# Altium PCB OneWireController.PcbDoc
Units mil, origin at the board's own origin, x right, y up, seen from the top; angles counter-clockwise.
Board outline 5413.39 x 4704.72 mil, 2 copper layers (Top Layer, Bottom Layer); 117 components, 95 nets, 388 pads, 0 vias.
Unrouted connection lines stored in the file: 256.
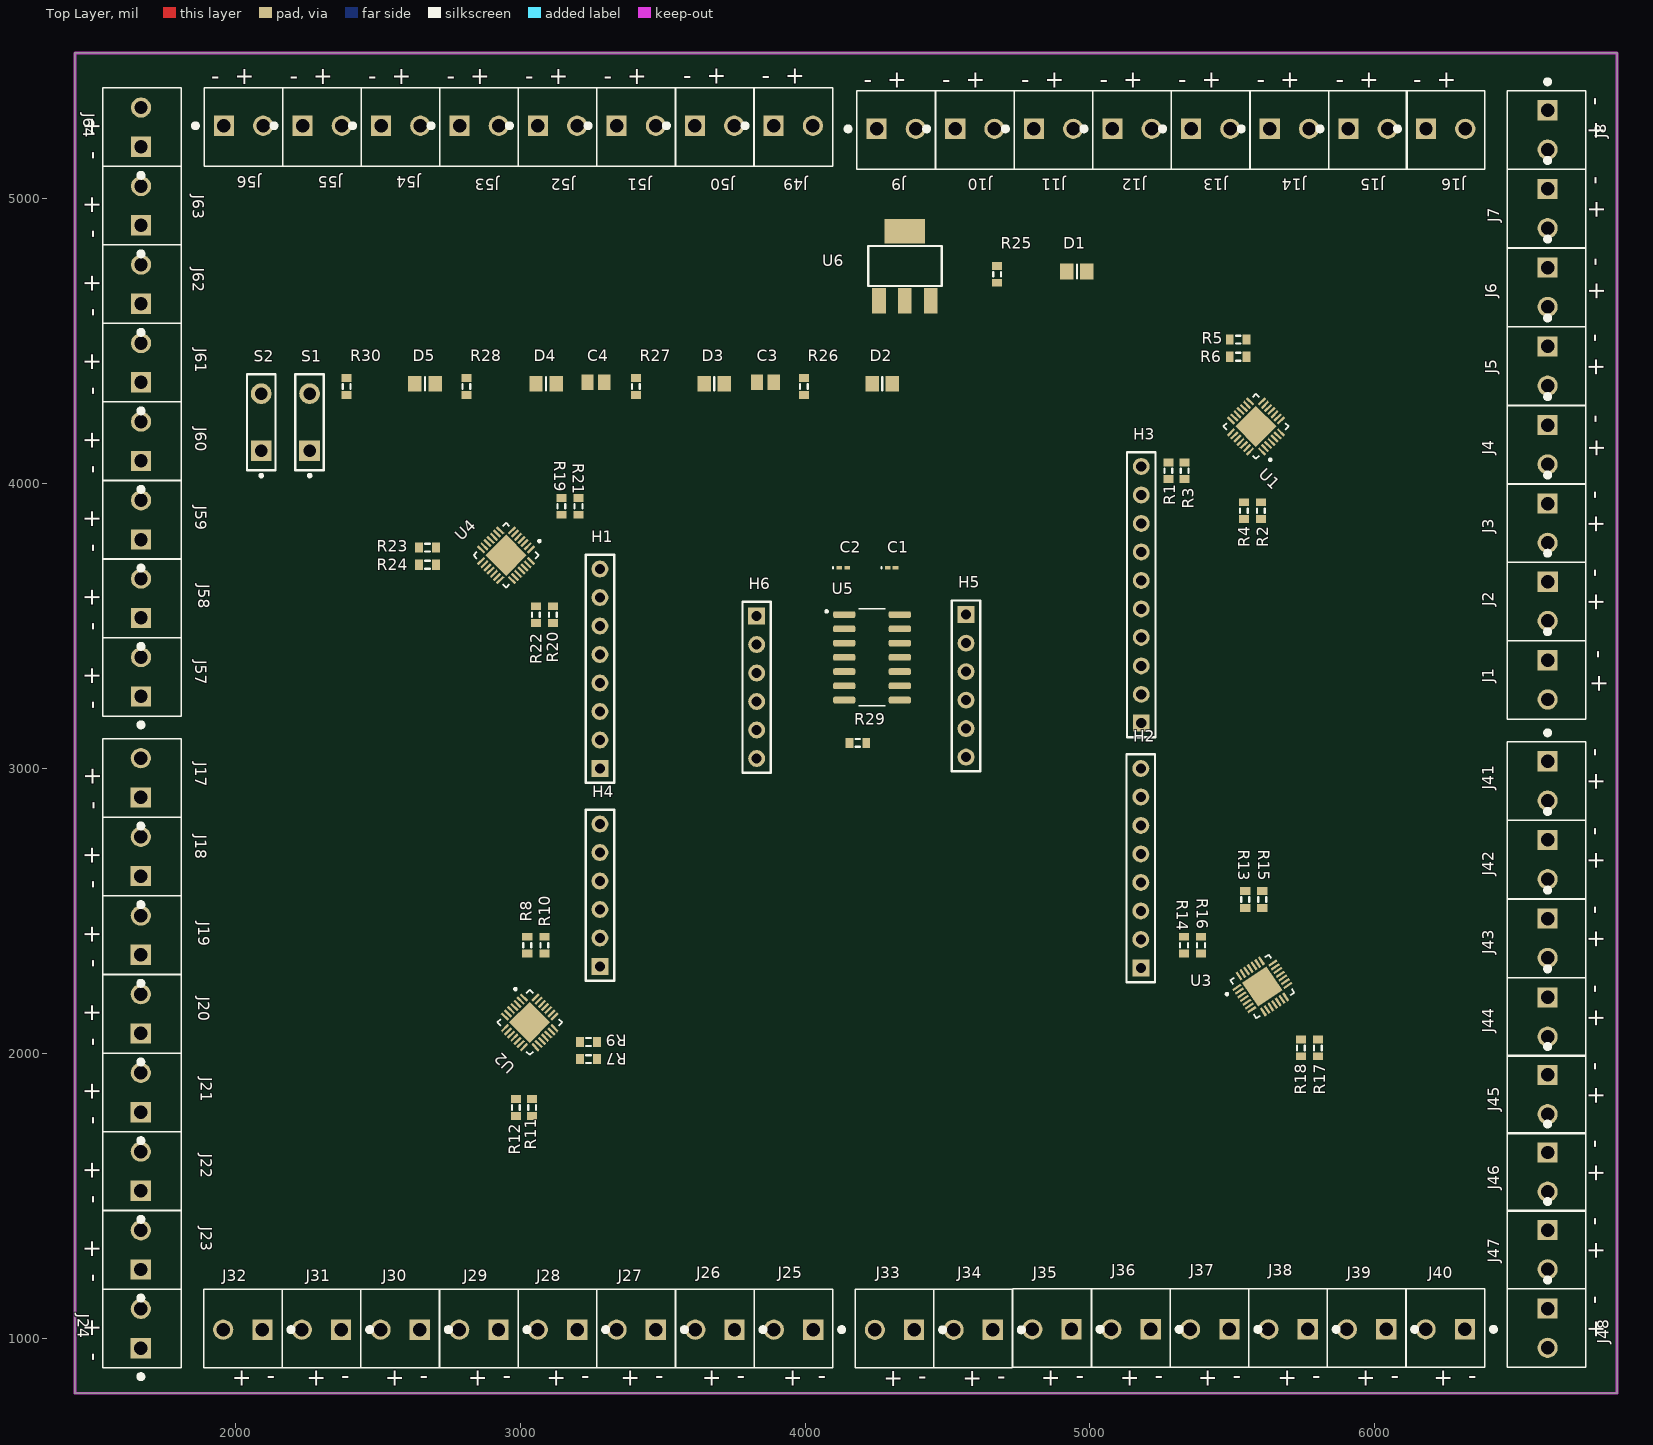
[diagram p0: Top Layer view]
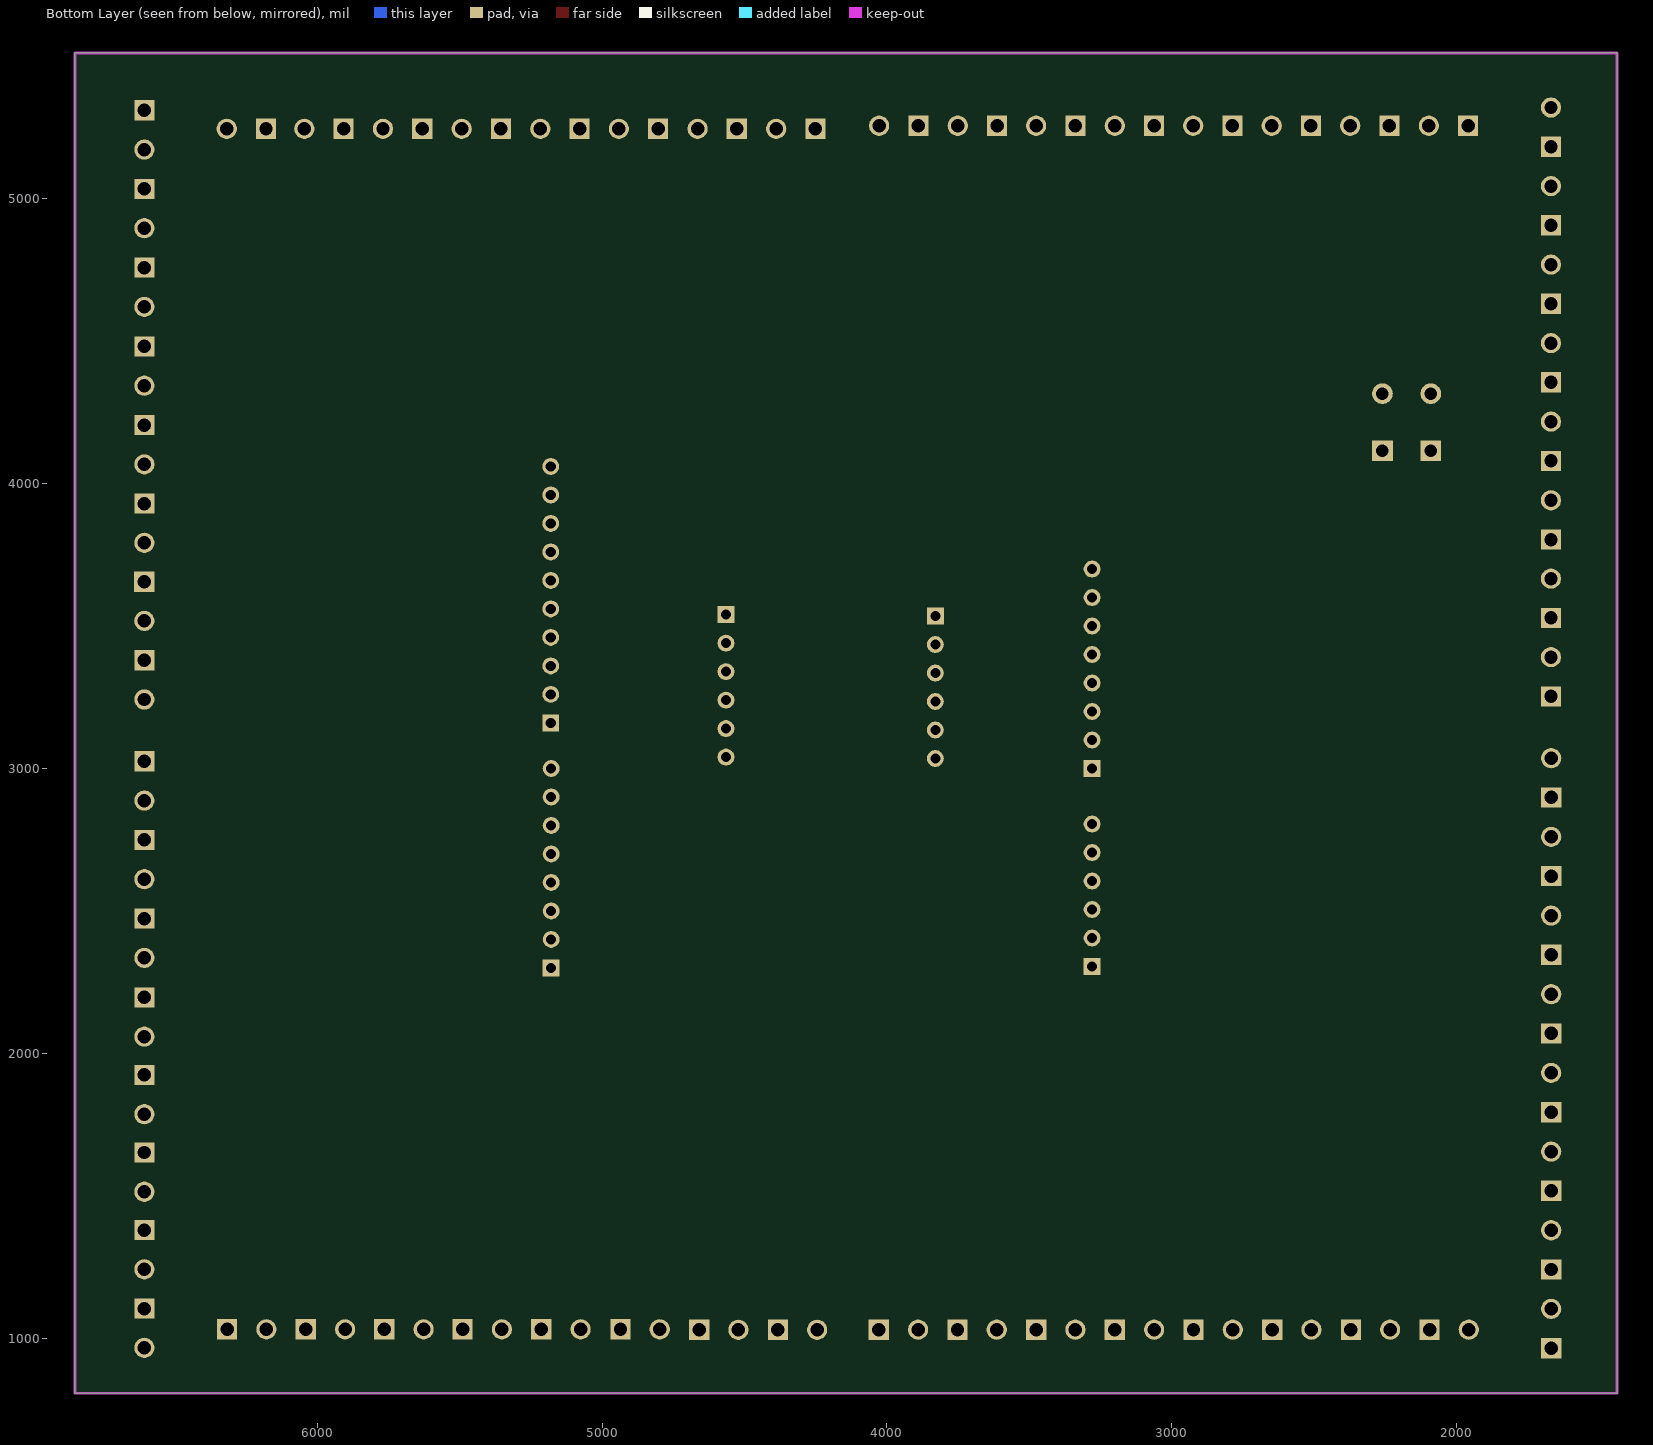
[diagram p1: Bottom Layer view, seen from below]

## Layer stack, top to bottom
Top Solder: solder mask 0.4, Solder Resist, Dk 3.5
Top Layer: signal copper 1.4
Dielectric 1: dielectric 12.6, FR-4, Dk 4.8
Bottom Layer: signal copper 1.4
Bottom Solder: solder mask 0.4, Solder Resist, Dk 3.5

## Board outline
1437.01,807.09 6850.39,807.09 6850.39,5511.81 1437.01,5511.81

## Design rules (kind name [scope] priority, off if disabled: settings)
Clearance [All] p1: gap=10 ignorepadtopadclearanceinfootprint=FALSE except(0: Arc-Hole Track-Hole SMDPad-Hole THPad-Hole Via-Hole Fill-Hole Poly-Hole Region-Hole Text-Hole)
PolygonConnect [All] p1: connectstyle=Relief reliefconductorwidth=10 reliefentries=4 polygonreliefangle="90 Angle" airgapwidth=10
RoutingVias [All] p1: holewidth=28 width=50 viastyle="Through Hole" minholewidth=28 minwidth=50 maxholewidth=28 maxwidth=50
SolderMaskExpansion [All] p1: expansion=4 istentingtop=FALSE
Width [All] p1: maxlimit=10 minlimit=10 preferedwidth=10
30 further rules are at their usual default settings.

## Classes and differential pairs
component class Sheet3: C3 C4 D1 D2 D3 D4 D5 R25 R26 R27 R28 R30 S1 S2 U6
component class Sheet2: J1 J2 J3 J4 J5 J6 J7 J8 J9 J10 J11 J12 J13 J14 J15 J16 J17 J18 J19 J20 J21 J22 J23 J24 J25 J26 J27 J28 J29 J30 J31 J32 J33 J34 J35 J36 J37 J38 J39 J40 J41 J42 J43 J44 J45 J46 J47 J48 J49 J50 J51 J52 J53 J54 J55 J56 J57 J58 J59 J60 J61 J62 J63 J64
component class Sheet1: C1 C2 H1 H2 H3 H4 H5 H6 R1 R2 R3 R4 R5 R6 R7 R8 R9 R10 R11 R12 R13 R14 R15 R16 R17 R18 R19 R20 R21 R22 R23 R24 R29 U1 U2 U3 U4 U5

## Components (designator, comment, footprint, x,y, rotation, side; value= is the part's Value field where it differs from the comment)
C1 "" 0603 4303.78,3705 r0 top value=100nF
C2 "" 0603 4133.78,3705 r0 top value=100nF
C3 "" C0805 3861.06,4355.55 r0 top value=4.7uF
C4 "" C0805 3266.06,4355.55 r0 top value=4.7uF
D1 "" 6-0805_N 4954.06,4744.25 r0 top
D2 "" 6-0805_N 4271.06,4350.55 r0 top
D3 "" 6-0805_N 3681.06,4350.55 r0 top
D4 "" 6-0805_N 3091.06,4350.55 r0 top
D5 "" 6-0805_N 2666.06,4350.55 r0 top
H1 "Header 8" HDR1X8 3280,3000 r90 top locked
H2 "Header 8" HDR1X8 5178.55,2300 r90 top locked
H3 "Header 10" HDR1X10 5180,3160 r90 top locked
H4 "PA1" HDR1X6 3280,2305 r90 top locked
H5 "PA1" HDR1X6 4565,3540 r270 top
H6 "PA1" HDR1X6 3830,3535 r270 top
J1 "1776275-2" TE_1776275-2 6606.3,3379.92 r270 top
J2 "1776275-2" TE_1776275-2 6606.47,3655.51 r270 top
J3 "1776275-2" TE_1776275-2 6606.3,3929.81 r270 top
J4 "1776275-2" TE_1776275-2 6606.14,4205.08 r270 top
J5 "1776275-2" TE_1776275-2 6606.3,4481.22 r270 top
J6 "1776275-2" TE_1776275-2 6606.3,4757.87 r270 top
J7 "1776275-2" TE_1776275-2 6606.3,5034.02 r270 top
J8 "1776275-2" TE_1776275-2 6606.3,5310.16 r270 top
J9 "1776275-2" TE_1776275-2 4250.86,5245.08 r0 top
J10 "1776275-2" TE_1776275-2 4527,5245.08 r0 top
J11 "1776275-2" TE_1776275-2 4803.15,5245.08 r0 top
J12 "1776275-2" TE_1776275-2 5078.74,5245.08 r0 top
J13 "1776275-2" TE_1776275-2 5354.87,5245.08 r0 top
J14 "1776275-2" TE_1776275-2 5631.02,5245.08 r0 top
J15 "1776275-2" TE_1776275-2 5907.16,5245.08 r0 top
J16 "1776275-2" TE_1776275-2 6179.37,5245.08 r0 top
J17 "1776275-2" TE_1776275-2 1668.6,2898.31 r90 top
J18 "1776275-2" TE_1776275-2 1668.6,2622.16 r90 top
J19 "1776275-2" TE_1776275-2 1668.6,2346.02 r90 top
J20 "1776275-2" TE_1776275-2 1668.6,2069.87 r90 top
J21 "1776275-2" TE_1776275-2 1668.6,1793.73 r90 top
J22 "1776275-2" TE_1776275-2 1668.6,1517.58 r90 top
J23 "1776275-2" TE_1776275-2 1668.6,1241.44 r90 top
J24 "1776275-2" TE_1776275-2 1668.6,965.29 r90 top
J25 "1776275-2" TE_1776275-2 4028.54,1030.28 r180 top
J26 "1776275-2" TE_1776275-2 3752.4,1030.28 r180 top
J27 "1776275-2" TE_1776275-2 3476.25,1030.28 r180 top
J28 "1776275-2" TE_1776275-2 3200.11,1030.28 r180 top
J29 "1776275-2" TE_1776275-2 2923.97,1030.28 r180 top
J30 "1776275-2" TE_1776275-2 2647.82,1030.28 r180 top
J31 "1776275-2" TE_1776275-2 2371.68,1030.28 r180 top
J32 "1776275-2" TE_1776275-2 2095.53,1030.28 r180 top
J33 "1776275-2" TE_1776275-2 4382.9,1029.9 r180 top
J34 "1776275-2" TE_1776275-2 4659.05,1029.9 r180 top
J35 "1776275-2" TE_1776275-2 4935.19,1031.5 r180 top
J36 "1776275-2" TE_1776275-2 5213.06,1031.5 r180 top
J37 "1776275-2" TE_1776275-2 5489.2,1031.5 r180 top
J38 "1776275-2" TE_1776275-2 5764.24,1031.5 r180 top
J39 "1776275-2" TE_1776275-2 6039.83,1031.5 r180 top
J40 "1776275-2" TE_1776275-2 6315.97,1031.5 r180 top
J41 "1776275-2" TE_1776275-2 6606.3,3025.2 r270 top
J42 "1776275-2" TE_1776275-2 6606.3,2749.06 r270 top
J43 "1776275-2" TE_1776275-2 6606.3,2472.91 r270 top
J44 "1776275-2" TE_1776275-2 6606.3,2196.54 r270 top
J45 "1776275-2" TE_1776275-2 6606.3,1924.34 r270 top
J46 "1776275-2" TE_1776275-2 6606.3,1652.13 r270 top
J47 "1776275-2" TE_1776275-2 6606.3,1379.92 r270 top
J48 "1776275-2" TE_1776275-2 6606.3,1104.33 r270 top
J49 "1776275-2" TE_1776275-2 3889.76,5255.91 r0 top
J50 "1776275-2" TE_1776275-2 3613.62,5255.91 r0 top
J51 "1776275-2" TE_1776275-2 3338.58,5255.91 r0 top
J52 "1776275-2" TE_1776275-2 3062.44,5255.91 r0 top
J53 "1776275-2" TE_1776275-2 2787.4,5255.91 r0 top
J54 "1776275-2" TE_1776275-2 2511.81,5255.91 r0 top
J55 "1776275-2" TE_1776275-2 2236.22,5255.91 r0 top
J56 "1776275-2" TE_1776275-2 1960.07,5255.91 r0 top
J57 "1776275-2" TE_1776275-2 1669.29,3252.95 r90 top
J58 "1776275-2" TE_1776275-2 1669.29,3528.54 r90 top
J59 "1776275-2" TE_1776275-2 1669.29,3803.58 r90 top
J60 "1776275-2" TE_1776275-2 1669.29,4079.73 r90 top
J61 "1776275-2" TE_1776275-2 1669.29,4355.32 r90 top
J62 "1776275-2" TE_1776275-2 1669.29,4630.91 r90 top
J63 "1776275-2" TE_1776275-2 1669.29,4906.5 r90 top
J64 "1776275-2" TE_1776275-2 1669.29,5182.09 r90 top
R1 "" J1-0603 5275,4045 r90 top value=100R
R2 "" J1-0603 5600,3905 r90 top value=100R
R3 "" J1-0603 5332.25,4045 r90 top value=100R
R4 "" J1-0603 5540,3905 r90 top value=100R
R5 "" J1-0603 5520,4505 r0 top value=0R
R6 "" J1-0603 5520,4445 r0 top value=0R
R7 "" J1-0603 3240,1980 r180 top value=100R
R8 "" J1-0603 3025,2380 r270 top value=100R
R9 "" J1-0603 3240,2040 r180 top value=100R
R10 "" J1-0603 3085,2380 r270 top value=100R
R11 "" J1-0603 3042.25,1810 r90 top value=0R
R12 "" J1-0603 2985,1810 r90 top value=0R
R13 "" J1-0603 5545,2540 r270 top value=100R
R14 "" J1-0603 5330,2380 r270 top value=100R
R15 "" J1-0603 5604.53,2540 r270 top value=100R
R16 "" J1-0603 5389.53,2380 r270 top value=100R
R17 "" J1-0603 5800,2019.27 r90 top value=0R
R18 "" J1-0603 5740.47,2019.27 r90 top value=0R
R19 "" J1-0603 3144.53,3920 r270 top value=100R
R20 "" J1-0603 3115,3540 r90 top value=100R
R21 "" J1-0603 3205,3920 r270 top value=100R
R22 "" J1-0603 3055,3540 r90 top value=100R
R23 "" J1-0603 2675,3775 r0 top value=0R
R24 "" J1-0603 2675,3715 r0 top value=0R
R25 "" J1-0603 4674.06,4734.25 r90 top value=100R
R26 "" J1-0603 3996.06,4340.55 r90 top value=100R
R27 "" J1-0603 3406.06,4340.55 r90 top value=100R
R28 "" J1-0603 2811.06,4340.55 r90 top value=100R
R29 "" J1-0603 4185,3090 r180 top value=100R
R30 "" J1-0603 2391.06,4340.55 r90 top value=100R
S1 "" SPST-2 2261.06,4215.55 r90 top
S2 "" SPST-2 2091.06,4215.55 r90 top
U1 "MAX14661ETI" QFN40P400X400X80-29N 5582.73,4200.46 r135 top
U2 "MAX14661ETI" QFN40P400X400X80-29N 3033.5,2108.82 r315 top
U3 "MAX14661ETI" QFN40P400X400X80-29N 5605,2235 r34 top
U4 "MAX14661ETI" QFN40P400X400X80-29N 2950.46,3748.34 r225 top
U5 "TXB0104D" SOIC127P600X175-14N 4235,3390 r0 top
U6 "AP2114H-3.3TRG1" SOT230P700X180-4N 4350.39,4763.78 r0 top

## Footprints (in the part's own frame and the unit in brackets; to place one, negate y for a bottom-side part, rotate by r counter-clockwise, add the part's x,y. Pads: shape width x height; smd on the part's side, far side on the other; paste and mask are expansions set on the pad)
6-0805_N [mm] "Chip Resistor, Body 2.0x1.2mm, IPC Medium Density"
  rect 1.2x1.4 smd: 1(-0.9,0) 2(0.9,0)
  silkscreen extent 0,-0.6 0,0.6, body extent -1.07,-0.7 1.07,0.7, height 0.7
0603 [mm] "Chip Inductor, Body 0.6x0.3mm, IPC High Density"
  rect 0.5x0.3 smd: 1(-0.35,0) 2(0.35,0)
  silkscreen extent -0.9,-0.05 -0.9,0.05, body extent -0.33,-0.18 0.33,0.18, height 0.55
C0805 [mm] "Chip Capacitor, Body 2.0x1.3mm, IPC High Density"
  rect 1.1x1.4 smd: 1(-0.75,0) 2(0.75,0)
  body extent -1.1,-0.72 1.1,0.72, height 1.4
HDR1X6 [mm] "Connector; Header; 6 Position"
  rect 1.5x1.5 hole 0.9: 1(0,0)
  round 1.5 hole 0.9: 2(2.54,0) 3(5.08,0) 4(7.62,0) 5(10.16,0) 6(12.7,0)
  silkscreen extent -1.27,-1.27 13.97,1.27
HDR1X8 [mm] "Connector; Header; 8 Position"
  rect 1.5x1.5 hole 0.9: 1(0,0)
  round 1.5 hole 0.9: 2(2.54,0) 3(5.08,0) 4(7.62,0) 5(10.16,0) 6(12.7,0) 7(15.24,0) 8(17.78,0)
  silkscreen extent -1.27,-1.27 19.05,1.27
HDR1X10 [mm] "Connector; Header; 10 Position"
  rect 1.5x1.5 hole 0.9: 1(0,0)
  round 1.5 hole 0.9: 2(2.54,0) 3(5.08,0) 4(7.62,0) 5(10.16,0) 6(12.7,0) 7(15.24,0) 8(17.78,0) 9(20.32,0) 10(22.86,0)
  silkscreen extent -1.27,-1.27 24.13,1.27
J1-0603 [mm] "Chip Resistor, Body 1.6x0.8mm, IPC High Density"
  rect 0.7x0.9 smd: 1(-0.75,0) 2(0.75,0)
  silkscreen extent -0.2,-0.35 0.2,0.35, body extent -0.85,-0.48 0.85,0.48, height 0.9
QFN40P400X400X80-29N [mm]
  rrect25% 0.86x0.22 smd: 1(-1.935,1.2) 2(-1.935,0.8) 3(-1.935,0.4) 4(-1.935,0) 5(-1.935,-0.4) 6(-1.935,-0.8) 7(-1.935,-1.2) 15(1.935,-1.2) 16(1.935,-0.8) 17(1.935,-0.4) 18(1.935,0) 19(1.935,0.4) 20(1.935,0.8) 21(1.935,1.2)
  rrect25% 0.22x0.86 smd: 8(-1.2,-1.935) 9(-0.8,-1.935) 10(-0.4,-1.935) 11(0,-1.935) 12(0.4,-1.935) 13(0.8,-1.935) 14(1.2,-1.935) 22(1.2,1.935) 23(0.8,1.935) 24(0.4,1.935) 25(0,1.935) 26(-0.4,1.935) 27(-0.8,1.935) 28(-1.2,1.935)
  rect 2.6x2.6 smd paste-0.48: 29(0,0)
  silkscreen extent -3.09,-2.05 2.05,2.05
SOIC127P600X175-14N [mm]
  rrect50% 1.97x0.6 smd: 1(-2.475,3.81) 2(-2.475,2.54) 3(-2.475,1.27) 4(-2.475,0) 5(-2.475,-1.27) 6(-2.475,-2.54) 7(-2.475,-3.81) 8(2.475,-3.81) 9(2.475,-2.54) 10(2.475,-1.27) 11(2.475,0) 12(2.475,1.27) 13(2.475,2.54) 14(2.475,3.81)
  silkscreen extent -4.15,-4.33 1.17,4.33, body extent -3,-4.33 3,4.33, height 1.75
SOT230P700X180-4N [mil]
  rect 48x88 smd: 1(-91,-122) 2(0,-122) 3(91,-122)
  rect 141.73x86.61 smd: 4(0,122.01)
  silkscreen extent -129,-70 129,70
SPST-2 [mm] "Switch; 2 Leads"
  rect 1.85x1.85 hole 1.1: 1(-2.54,0)
  round 1.85 hole 1.1: 2(2.54,0)
  silkscreen extent -4.89,-1.27 4.28,1.27
TE_1776275-2 [mm]
  rect 1.8x1.8 hole 1.2: 1(0,0)
  round 1.8 hole 1.2: 2(3.5,0)
  silkscreen extent -2.74,-3.6 5.25,3.4, body extent -2.29,-3.39 5.71,3.61, height 8.5

## Part data
C1 C2 C3 C4: library part "Cap Semi", "Capacitor (Semiconductor SIM Model)", LatestRevisionDate=29-May-2009, LatestRevisionNote="IPC-7351 Footprint Added.", PackageDescription="Chip Capacitor", PackageReference=C1206, Published=8-Jun-2000, Publisher="Altium Limited"
D1 D2 D3 D4 D5: library part LED3, "Typical BLUE SiC LED", DatasheetVersion=16-Apr-2002, LatestRevisionDate=17-Dec-2003, LatestRevisionNote="PCB Footprint replaced.", PackageDescription="SM LED; 2 C-Bend Leads; Body 3.5 x 2.8 x 1.9 mm, inc leads (LxWxH typ)", PackageReference=3.5X2.8X1.9, PackageVersion=16-Apr-2002, Published=8-Jun-2000, Publisher="Altium Limited"
H1 H2: "Header, 8-Pin", LatestRevisionDate=17-Jul-2002, LatestRevisionNote="Re-released for DXP Platform.", Publisher="Altium Limited"
H3: "Header, 10-Pin", LatestRevisionDate=17-Jul-2002, LatestRevisionNote="Re-released for DXP Platform.", Publisher="Altium Limited"
H4 H5 H6: library part "Header 6", "Header, 6-Pin", LatestRevisionDate=17-Jul-2002, LatestRevisionNote="Re-released for DXP Platform.", Publisher="Altium Limited"
J1 J2 J3 J4 J5 J6 J7 J8 J9 J10 J11 J12 J13 J14 J15 J16 J17 J18 J19 J20 J21 J22 J23 J24 J25 J26 J27 J28 J29 J30 J31 J32 J33 J34 J35 J36 J37 J38 J39 J40 J41 J42 J43 J44 J45 J46 J47 J48 J49 J50 J51 J52 J53 J54 J55 J56 J57 J58 J59 J60 J61 J62 J63 J64: "TERM BLOCK 2POS SIDE ENT 3.5MM", Package=None, Availability=Unavailable, MF="{'manufacturer': u'TE Connectivity'}", MP=1776275-2, Price=None
R1 R2 R3 R4 R5 R6 R7 R8 R9 R10 R11 R12 R13 R14 R15 R16 R17 R18 R19 R20 R21 R22 R23 R24 R25 R26 R27 R28 R29 R30: library part Res3, "Resistor", LatestRevisionDate=29-May-2009, LatestRevisionNote="IPC-7351 Footprint Added.", PackageDescription="Chip Resistor", PackageReference=J1-0603, Published=8-Jun-2000, Publisher="Altium Limited"
S1 S2: library part SW-PB, "Switch", LatestRevisionDate=17-Jul-2002, LatestRevisionNote="Re-released for DXP Platform.", PackageDescription="Switch; 2 Leads", PackageReference=SPST-2, Published=24-Mar-1999, Publisher="Altium Limited"
U1 U2 U3 U4: "None", Availability=Unavailable, MF="{'manufacturer': u'Maxim Integrated'}", MP=MAX14661ETI, Package=None, Price=None
U5 U6: Package=None, Availability=Unavailable, Price=None
  U5: MF="{'manufacturer': u'Texas Instruments'}", MP=TXB0104D
  U6: MF="{'manufacturer': u'Diodes Inc.'}", MP=AP2114H-3.3TRG1

## Nets (pads, with @x,y where several pads share a name; then routed paths per layer and width w, separated by ;. In a path a pad name is that pad's centre, name@x,y a point inside that pad or via, vN(x,y) a via of type N, cw(c..) or ccw(c..) an arc to the next point about the centre after c; other vN are vias at no path point)
1-wire-Host-H: H3.8 H5.2 U5.2
1-wire-Host-L: H6.2 U1.10 U2.10 U3.10 U4.10 U5.13
1-wire-slave-1: J1.2 U1.2
1-wire-slave-2: J2.2 U1.3
1-wire-slave-3: J3.2 U1.4
1-wire-slave-4: J4.2 U1.5
1-wire-slave-5: J5.2 U1.6
1-wire-slave-6: J6.2 U1.7
1-wire-slave-7: J7.2 U1.8
1-wire-slave-8: J8.2 U1.9
1-wire-slave-9: J9.2 U1.21
1-wire-slave-10: J10.2 U1.20
1-wire-slave-11: J11.2 U1.19
1-wire-slave-12: J12.2 U1.18
1-wire-slave-13: J13.2 U1.17
1-wire-slave-14: J14.2 U1.16
1-wire-slave-15: J15.2 U1.15
1-wire-slave-16: J16.2 U1.14
1-wire-slave-17: J17.2 U2.2
1-wire-slave-18: J18.2 U2.3
1-wire-slave-19: J19.2 U2.4
1-wire-slave-20: J20.2 U2.5
1-wire-slave-21: J21.2 U2.6
1-wire-slave-22: J22.2 U2.7
1-wire-slave-23: J23.2 U2.8
1-wire-slave-24: J24.2 U2.9
1-wire-slave-25: J25.2 U2.21
1-wire-slave-26: J26.2 U2.20
1-wire-slave-27: J27.2 U2.19
1-wire-slave-28: J28.2 U2.18
1-wire-slave-29: J29.2 U2.17
1-wire-slave-30: J30.2 U2.16
1-wire-slave-31: J31.2 U2.15
1-wire-slave-32: J32.2 U2.14
1-wire-slave-33: J33.2 U3.2
1-wire-slave-34: J34.2 U3.3
1-wire-slave-35: J35.2 U3.4
1-wire-slave-36: J36.2 U3.5
1-wire-slave-37: J37.2 U3.6
1-wire-slave-38: J38.2 U3.7
1-wire-slave-39: J39.2 U3.8
1-wire-slave-40: J40.2 U3.9
1-wire-slave-41: J41.2 U3.21
1-wire-slave-42: J42.2 U3.20
1-wire-slave-43: J43.2 U3.19
1-wire-slave-44: J44.2 U3.18
1-wire-slave-45: J45.2 U3.17
1-wire-slave-46: J46.2 U3.16
1-wire-slave-47: J47.2 U3.15
1-wire-slave-48: J48.2 U3.14
1-wire-slave-49: J49.2 U4.2
1-wire-slave-50: J50.2 U4.3
1-wire-slave-51: J51.2 U4.4
1-wire-slave-52: J52.2 U4.5
1-wire-slave-53: J53.2 U4.6
1-wire-slave-54: J54.2 U4.7
1-wire-slave-55: J55.2 U4.8
1-wire-slave-56: J56.2 U4.9
1-wire-slave-57: J57.2 U4.21
1-wire-slave-58: J58.2 U4.20
1-wire-slave-59: J59.2 U4.19
1-wire-slave-60: J60.2 U4.18
1-wire-slave-61: J61.2 U4.17
1-wire-slave-62: J62.2 U4.16
1-wire-slave-63: J63.2 U4.15
1-wire-slave-64: J64.2 U4.14
GND: C1.2 C2.2 C3.1 C4.1 D1.2 D2.2 D3.2 D4.2 D5.2 H1.6 H1.7 H3.4 H5.6 H6.6 J1.1 J2.1 J3.1 J4.1 J5.1 J6.1 J7.1 J8.1 J9.1 J10.1 J11.1 J12.1 J13.1 J14.1 J15.1 J16.1 J17.1 J18.1 J19.1 J20.1 J21.1 J22.1 J23.1 J24.1 J25.1 J26.1 J27.1 J28.1 J29.1 J30.1 J31.1 J32.1 J33.1 J34.1 J35.1 J36.1 J37.1 J38.1 J39.1 J40.1 J41.1 J42.1 J43.1 J44.1 J45.1 J46.1 J47.1 J48.1 J49.1 J50.1 J51.1 J52.1 J53.1 J54.1 J55.1 J56.1 J57.1 J58.1 J59.1 J60.1 J61.1 J62.1 J63.1 J64.1 R3.1 R4.1 R6.1 R9.1 R10.1 R12.1 R15.1 R16.1 R18.1 R21.1 R22.1 R24.1 R29.2 S1.1 S2.1 U1.1 U1.11 U1.25 U1.29 U2.1 U2.11 U2.25 U2.29 U3.1 U3.11 U3.25 U3.29 U4.1 U4.11 U4.25 U4.29 U5.7 U6.2
LED1: H4.3 R25.1
LED2: H4.4 R26.1
LED3: H4.5 R27.1
LED4: H4.6 R28.1
NetD1_1: D1.1 R25.2
NetD2_1: D2.1 R26.2
NetD3_1: D3.1 R27.2
NetD4_1: D4.1 R28.2
NetD5_1: D5.1 R30.2
NetR1_2: R1.2 R3.2 U1.23
NetR2_2: R2.2 R4.2 U1.28
NetR5_2: R5.2 R6.2 U1.13
NetR7_2: R7.2 R9.2 U2.23
NetR8_2: R8.2 R10.2 U2.28
NetR11_2: R11.2 R12.2 U2.13
NetR13_2: R13.2 R15.2 U3.23
NetR14_2: R14.2 R16.2 U3.28
NetR17_2: R17.2 R18.2 U3.13
NetR19_2: R19.2 R21.2 U4.23
NetR20_2: R20.2 R22.2 U4.28
NetR23_2: R23.2 R24.2 U4.13
NetR29_1: R29.1 U5.8
SCL: H3.1 U1.24 U2.24 U3.24 U4.24
SDA: H3.2 U1.27 U2.27 U3.27 U4.27
SW1: H4.1 S1.2
SW2: H4.2 S2.2
V3.3: C2.1 C4.2 H1.4 H5.1 R30.1 U5.14 U6.3
VDD: C1.1 C3.2 H1.5 H6.1 R1.1 R2.1 R5.1 R7.1 R8.1 R11.1 R13.1 R14.1 R17.1 R19.1 R20.1 R23.1 U1.22 U1.26 U2.22 U2.26 U3.22 U3.26 U4.22 U4.26 U5.1 U6.1
pads on no net: H1.1 H1.2 H1.3 H1.8 H2.1 H2.2 H2.3 H2.4 H2.5 H2.6 H2.7 H2.8 H3.3 H3.5 H3.6 H3.7 H3.9 H3.10 H5.3 H5.4 H5.5 H6.3 H6.4 H6.5 U1.12 U2.12 U3.12 U4.12 U5.3 U5.4 U5.5 U5.6 U5.9 U5.10 U5.11 U5.12 U6.4

## Keep-outs
Keep-Out Layer:
  lines w10: 1437.01,807.09 1437.01,5511.81 6850.39,5511.81 6850.39,807.09 6830.71,807.09 1437.01,807.09

## Text inside footprints (layer, text, board x,y; h text height)
J1: Top Overlay "-  +" at 6761.97,3415.2 h60 r270
J2: Top Overlay "-  +" at 6751.47,3700.51 h60 r270
J3: Top Overlay "-  +" at 6751.3,3974.81 h60 r270
J4: Top Overlay "-  +" at 6752.13,4241.97 h60 r270
J5: Top Overlay "-  +" at 6751.3,4526.22 h60 r270
J6: Top Overlay "-  +" at 6752.13,4793.15 h60 r270
J7: Top Overlay "-  +" at 6752.13,5078.58 h60 r270
J8: Top Overlay "-  +" at 6751.3,5355.16 h60 r270
J9: Top Overlay "-  +" at 4205.86,5390.08 h60
J10: Top Overlay "-  +" at 4482,5390.08 h60
J11: Top Overlay "-  +" at 4758.15,5390.08 h60
J12: Top Overlay "-  +" at 5033.74,5390.08 h60
J13: Top Overlay "-  +" at 5309.87,5390.08 h60
J14: Top Overlay "-  +" at 5586.02,5390.08 h60
J15: Top Overlay "-  +" at 5862.16,5390.08 h60
J16: Top Overlay "-  +" at 6134.37,5390.08 h60
J17: Top Overlay "-  +" at 1525.43,2854.49 h60 r90
J18: Top Overlay "-  +" at 1523.6,2577.16 h60 r90
J19: Top Overlay "-  +" at 1523.6,2301.02 h60 r90
J20: Top Overlay "-  +" at 1523.6,2024.87 h60 r90
J21: Top Overlay "-  +" at 1523.6,1748.73 h60 r90
J22: Top Overlay "-  +" at 1523.6,1472.58 h60 r90
J23: Top Overlay "-  +" at 1523.6,1196.44 h60 r90
J24: Top Overlay "-  +" at 1523.6,920.29 h60 r90
J25: Top Overlay "-  +" at 4073.54,885.28 h60 r180
J26: Top Overlay "-  +" at 3789.21,885.67 h60 r180
J27: Top Overlay "-  +" at 3503.78,885.67 h60 r180
J28: Top Overlay "-  +" at 3245.11,885.28 h60 r180
J29: Top Overlay "-  +" at 2968.97,885.28 h60 r180
J30: Top Overlay "-  +" at 2677.01,885.67 h60 r180
J31: Top Overlay "-  +" at 2401.42,885.67 h60 r180
J32: Top Overlay "-  +" at 2140.53,885.28 h60 r180
J33: Top Overlay "-  +" at 4427.9,884.9 h60 r180
J34: Top Overlay "-  +" at 4704.05,884.9 h60 r180
J35: Top Overlay "-  +" at 4980.19,886.5 h60 r180
J36: Top Overlay "-  +" at 5258.06,886.5 h60 r180
J37: Top Overlay "-  +" at 5531.34,885.67 h60 r180
J38: Top Overlay "-  +" at 5809.24,886.5 h60 r180
J39: Top Overlay "-  +" at 6084.83,886.5 h60 r180
J40: Top Overlay "-  +" at 6358.11,885.67 h60 r180
J41: Top Overlay "-  +" at 6751.3,3070.2 h60 r270
J42: Top Overlay "-  +" at 6751.3,2794.06 h60 r270
J43: Top Overlay "-  +" at 6751.3,2517.91 h60 r270
J44: Top Overlay "-  +" at 6751.3,2241.54 h60 r270
J45: Top Overlay "-  +" at 6751.3,1969.34 h60 r270
J46: Top Overlay "-  +" at 6751.3,1697.13 h60 r270
J47: Top Overlay "-  +" at 6751.3,1424.92 h60 r270
J48: Top Overlay "-  +" at 6751.3,1149.33 h60 r270
J49: Top Overlay "-  +" at 3848.58,5403.7 h60
J50: Top Overlay "-  +" at 3572.99,5403.7 h60
J51: Top Overlay "-  +" at 3293.58,5400.91 h60
J52: Top Overlay "-  +" at 3017.44,5400.91 h60
J53: Top Overlay "-  +" at 2742.4,5400.91 h60
J54: Top Overlay "-  +" at 2466.81,5400.91 h60
J55: Top Overlay "-  +" at 2191.22,5400.91 h60
J56: Top Overlay "-  +" at 1915.07,5400.91 h60
J57: Top Overlay "-  +" at 1524.29,3207.95 h60 r90
J58: Top Overlay "-  +" at 1524.29,3483.54 h60 r90
J59: Top Overlay "-  +" at 1524.29,3758.58 h60 r90
J60: Top Overlay "-  +" at 1524.29,4034.73 h60 r90
J61: Top Overlay "-  +" at 1524.29,4310.32 h60 r90
J62: Top Overlay "-  +" at 1524.29,4585.91 h60 r90
J63: Top Overlay "-  +" at 1524.29,4861.5 h60 r90
J64: Top Overlay "-  +" at 1524.29,5137.09 h60 r90